# EAGLE board id (EAGLE 4.09)
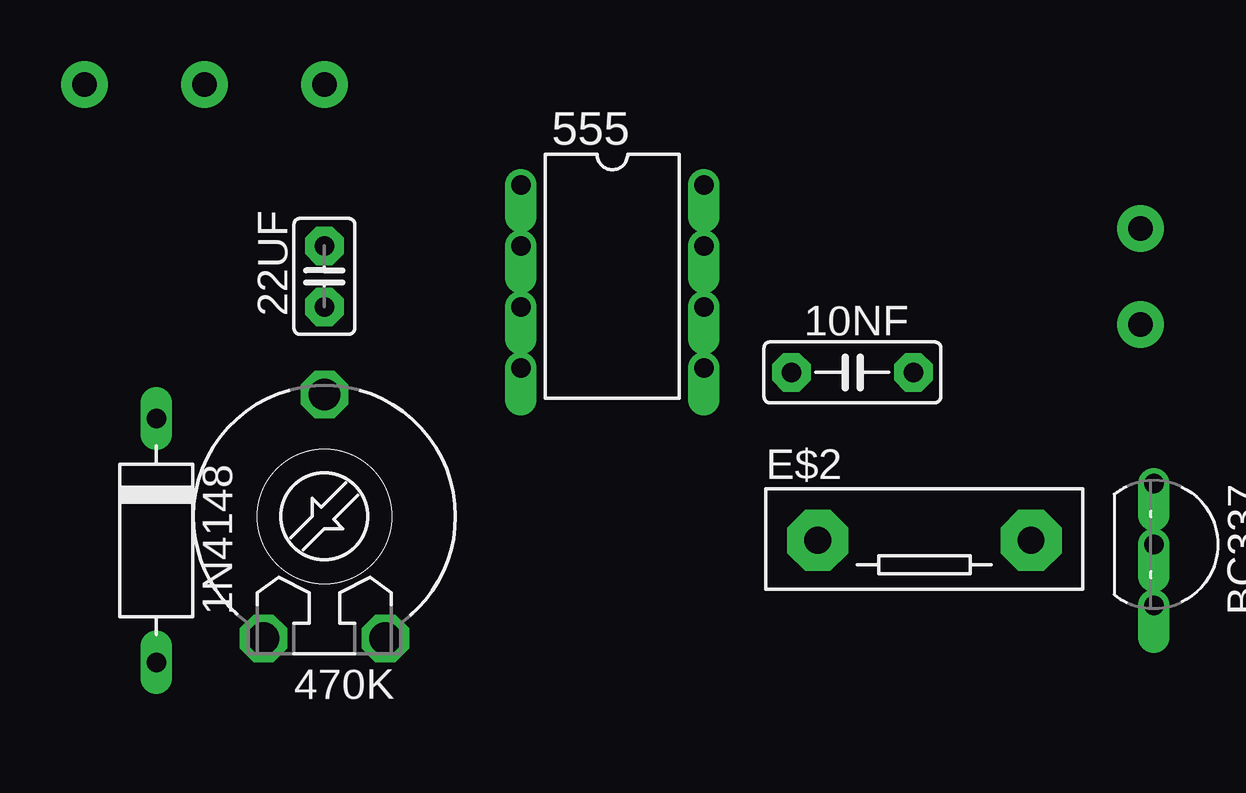
[diagram p0: board, top side]
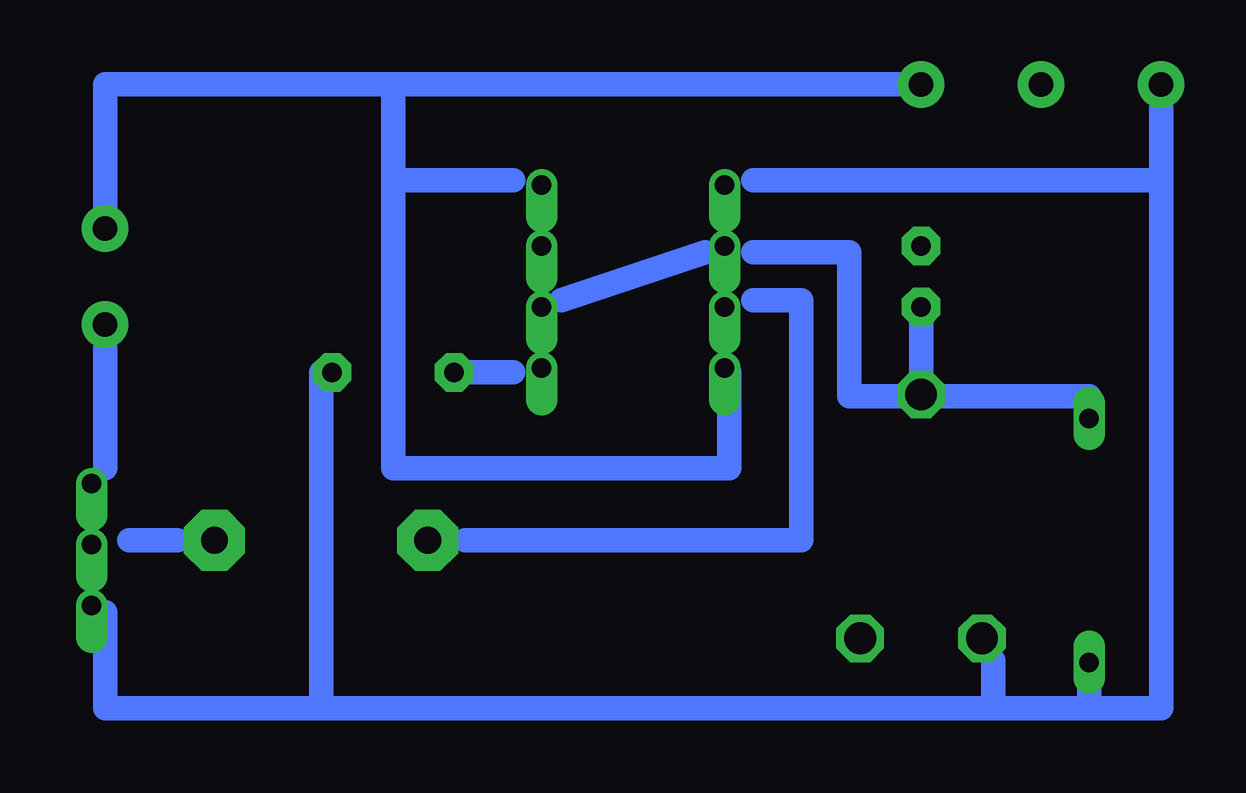
[diagram p1: board, bottom side, seen from below]

No outline drawn. Coordinates in mm, seen from the top.
Copper layers used: Bottom

## Footprints (pad centres in the part's own frame; a part is rotated, then mirrored left to right if it is on the bottom)
D-10 = drill 0.813 long: A 5.08,0; C -5.08,0
C5B2.5 = drill 0.813 pad 1.6 octagon: 1 -2.54,0; 2 2.54,0
C2.5-2 = drill 0.813 pad 1.6 octagon: 1 -1.27,0; 2 1.27,0
LI10 = drill 1.321 octagon: A -2.54,-5.08; E 2.54,-5.08; S 0,5.08
DIL08 = drill 0.813 offset: 1 -3.81,-3.81; 2 -1.27,-3.81; 3 1.27,-3.81; 4 3.81,-3.81; 5 3.81,3.81; 6 1.27,3.81; 7 -1.27,3.81; 8 -3.81,3.81
TO92-CBE = drill 0.813 offset: B 0,0; C 2.54,0; E -2.54,0
MPC70-2 = drill 1.118 pad 2.54 octagon: 1 -4.445,0; 2 4.445,0

## Placement (x,y rotation side)
1N4148  [D-10]  26,15 270 top
10NF  [C5B2.5]  55,22 0 top
22UF  [C2.5-2]  33,26 90 top
470K  [LI10]  33,16 0 top
555  [DIL08]  45,26 270 top
BC337  [TO92-CBE]  67.56,14.83 270 top
E$2  [MPC70-2]  58,15 0 top

## Library data of the parts
1N4148 = diode
10NF 22UF = capacitor-wima
470K = pot
555 = analog-devices
BC337 = transistor-npn
E$2 = resistor-power

## Tracks (layer width: path | path; a pad name or v marks a point on that pad's centre or on a via)
A  (via drill 1.02 pad 1.93)
  Bottom 1.016: 41,22 41,18 55,18 55,30 | 55,32 55,33 | 55,30 55,32 | 55,30 50,30 | 55,32 55,34 | 55,34 v33,34 | 55,34 67,34 v67,28
S$1
  Bottom 1.016: 50,22 52,22
S$2
  Bottom 1.016: 42,27 48,25
S$3  (via drill 1.02 pad 1.93)
  Bottom 1.016: 67,23 67,18
  other vias: 67,24
S$4
  Bottom 1.016: 40,25 38,25 38,15 52,15
S$6
  Bottom 1.016: 64,15 66,15
S$8
  Bottom 1.016: 40,30 23,30 23,28
S$9
  Bottom 1.016: 33,24 33,21 | 40,27 36,27 36,21 33,21 | 33,21 26,21
S$10  (via drill 1.02 pad 1.93)
  other vias: 28,34
S$11  (via drill 1.02 pad 1.93)
  Bottom 1.016: 23,33 23,8 26,8 | 30,8 58,8 | 58,8 67,8 67,12 | 58,22 58,8 | 30,8 30,10 | 30,8 26,8 | 26,8 26,9
  other vias: 23,34

## Text on the board
Pads: _ | K1 | 9V | + | K2 | Izzó